# Altium PCB I2CKeypad.PcbDoc
Units mm, origin at the board's own origin, x right, y up, seen from the top; angles counter-clockwise.
Board outline 32 x 50 mm, 2 copper layers (Top Layer, Bottom Layer); 48 components, 37 nets, 124 pads, 29 vias.
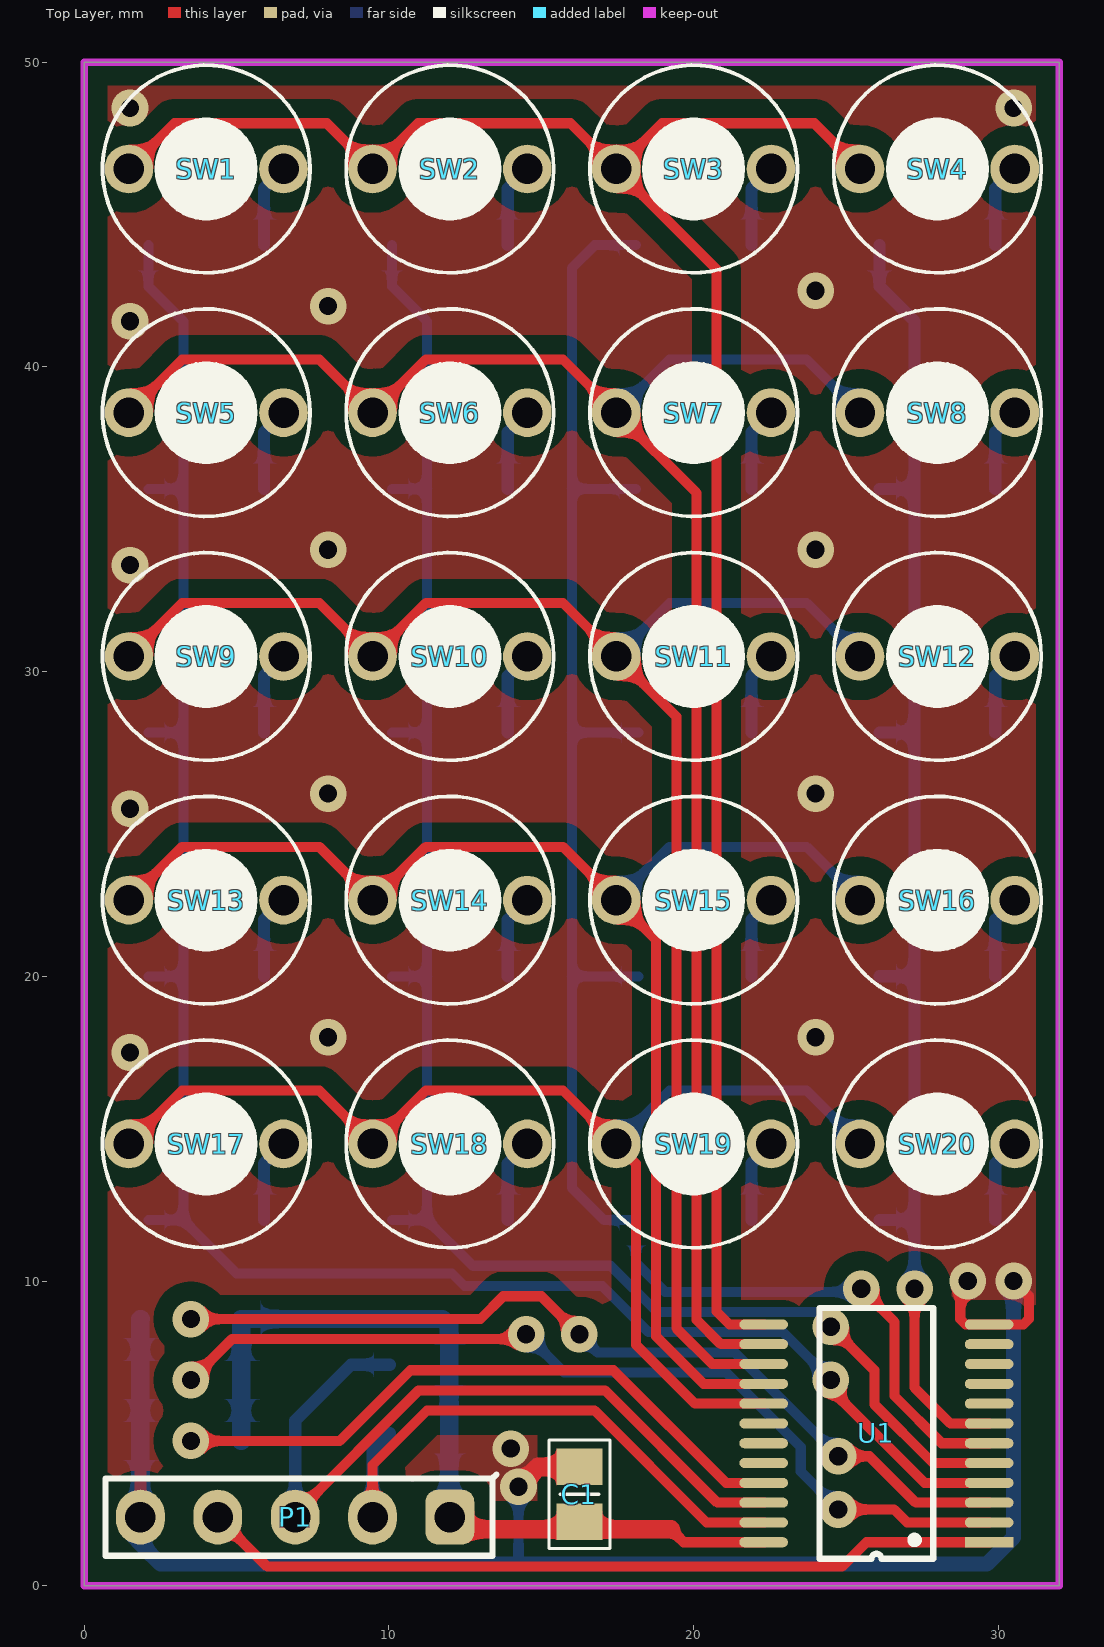
[diagram p0: Top Layer view]
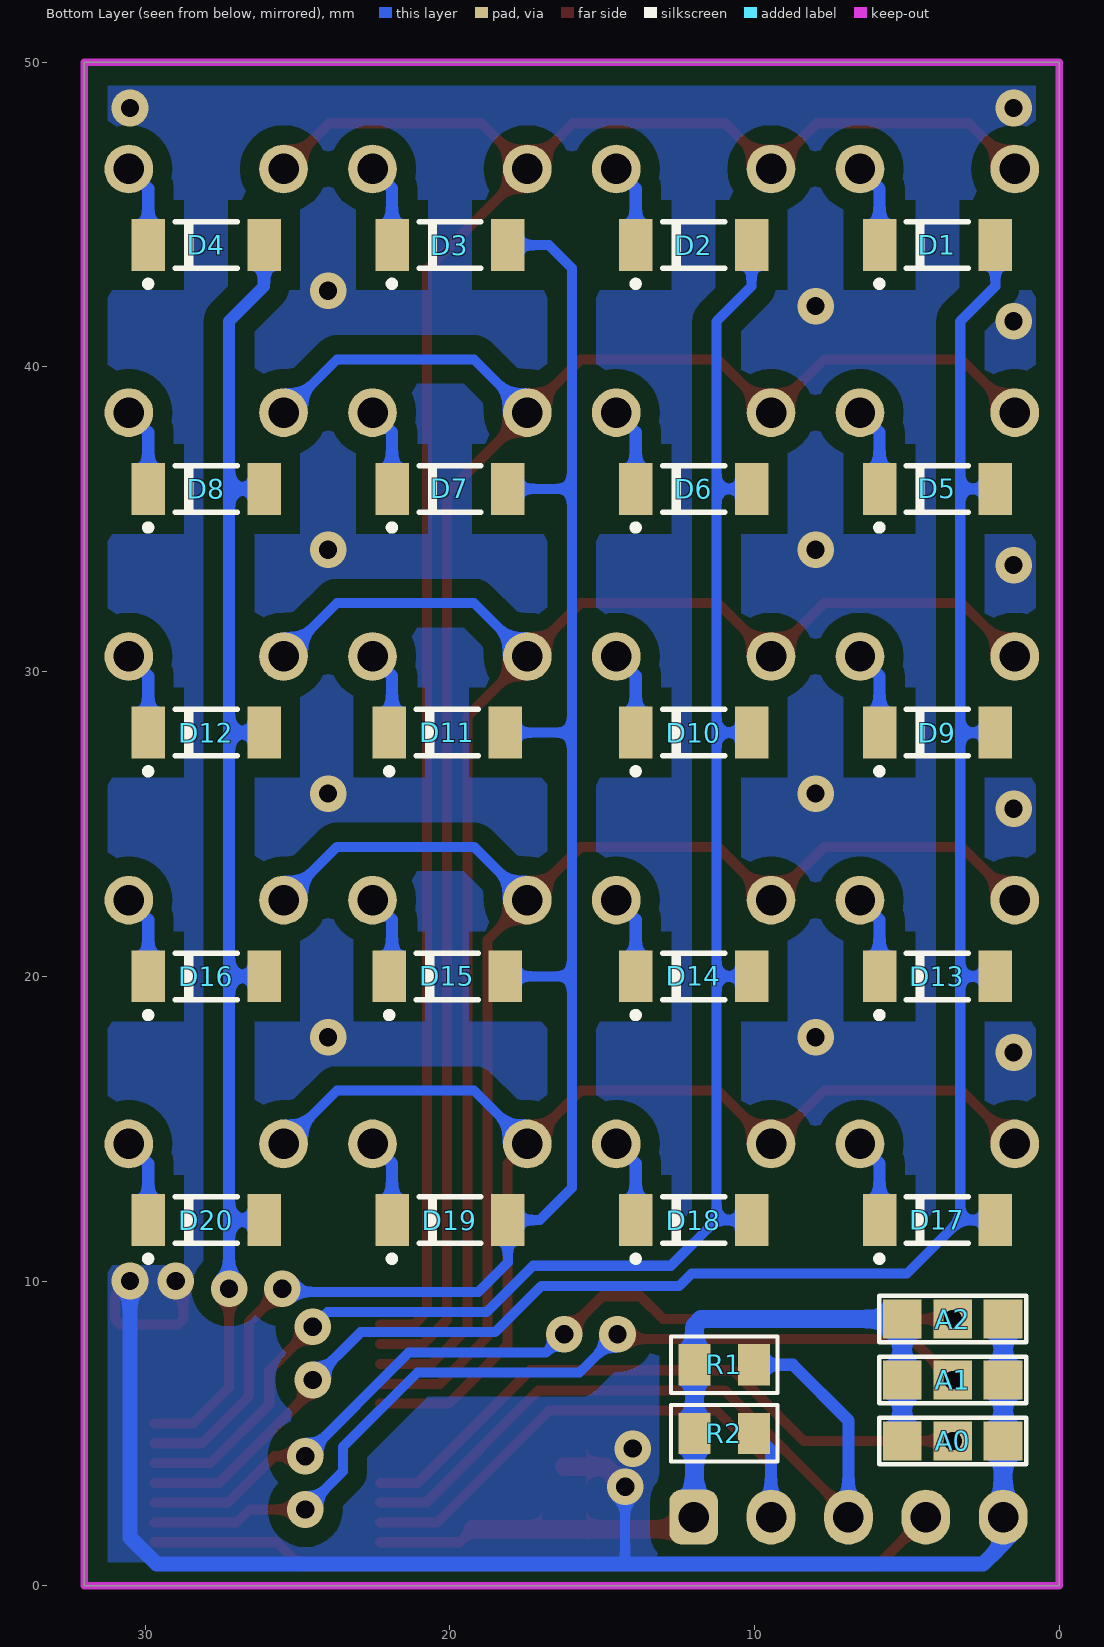
[diagram p1: Bottom Layer view, seen from below]
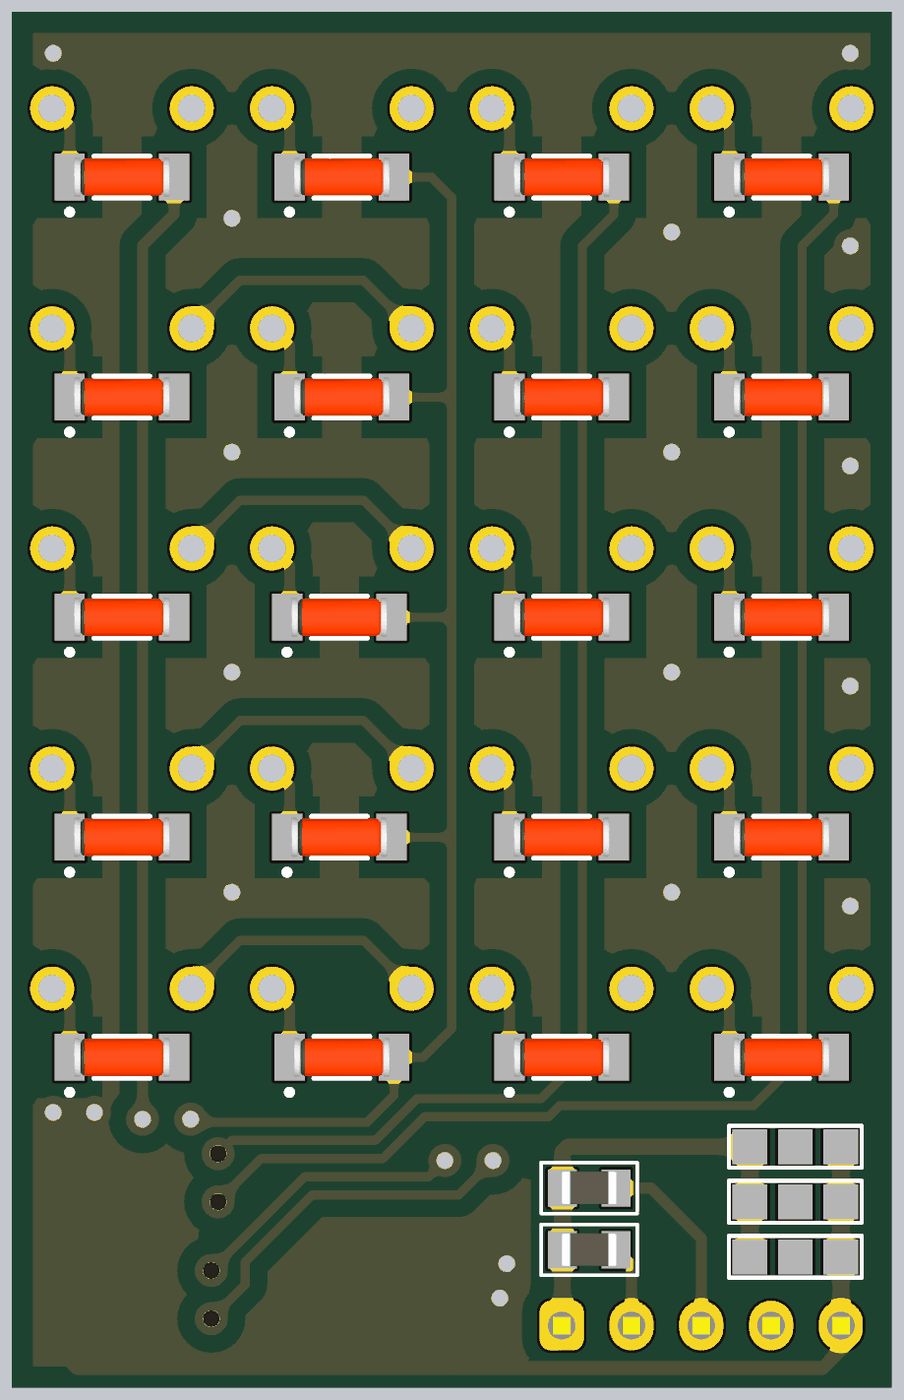
[diagram p2: 3D render of the assembled board from below, using the file's embedded part models]

## Layer stack, top to bottom
Top Solder: solder mask 0.0102, Solder Resist, Dk 3.5
Top Layer: signal copper 0.0356
Dielectric 1: dielectric 0.32, FR-4, Dk 4.8
Bottom Layer: signal copper 0.0356
Bottom Solder: solder mask 0.0102, Solder Resist, Dk 3.5

## Board outline
0,0 0,50 32,50 32,0

## Design rules (kind name [scope] priority, off if disabled: settings)
Clearance Clearance_1 [InPolygon] p1: gap=0.635
Clearance [All] p2: gap=0.33
PolygonConnect PolygonConnect_1 [IsVia] p1: connectstyle=Direct reliefconductorwidth=0.254 reliefentries=4 polygonreliefangle="90 Angle" airgapwidth=0.254
PolygonConnect [All] p2: connectstyle=Relief reliefconductorwidth=0.381 reliefentries=4 polygonreliefangle="90 Angle" airgapwidth=0.635
RoutingVias [All] p1: holewidth=1.524 width=2.54 viastyle="Through Hole" minholewidth=0.508 minwidth=1.016 maxholewidth=0.711 maxwidth=1.27
SolderMaskExpansion [All] p1: expansion=0.102
UnpouredPolygon [All] p1: allowunpoured=FALSE
Width [All] p1: maxlimit=5.08 minlimit=0.203 preferedwidth=0.305
29 further rules are at their usual default settings.

## Components (designator, comment, footprint, x,y, rotation, side; value= is the part's Value field where it differs from the comment)
A0 "JUMP 3" "JUMP3 SMD" 3.5,4.75 r180 bottom
A1 "JUMP 3" "JUMP3 SMD" 3.5,6.75 r180 bottom
A2 "JUMP 3" "JUMP3 SMD" 3.5,8.75 r180 bottom
C1 "100nF" "C 0805" 16.25,3 r90 top
D1 "1N4148" "Diode SOD80C Wave" 4,44 r0 bottom
D2 "1N4148" "Diode SOD80C Wave" 12,44 r0 bottom
D3 "1N4148" "Diode SOD80C Wave" 20,44 r0 bottom
D4 "1N4148" "Diode SOD80C Wave" 28,44 r0 bottom
D5 "1N4148" "Diode SOD80C Wave" 4,36 r0 bottom
D6 "1N4148" "Diode SOD80C Wave" 12,36 r0 bottom
D7 "1N4148" "Diode SOD80C Wave" 20,36 r0 bottom
D8 "1N4148" "Diode SOD80C Wave" 28,36 r0 bottom
D9 "1N4148" "Diode SOD80C Wave" 4,28 r0 bottom
D10 "1N4148" "Diode SOD80C Wave" 12,28 r0 bottom
D11 "1N4148" "Diode SOD80C Wave" 20.09,28 r0 bottom
D12 "1N4148" "Diode SOD80C Wave" 28,28 r0 bottom
D13 "1N4148" "Diode SOD80C Wave" 4,20 r0 bottom
D14 "1N4148" "Diode SOD80C Wave" 12,20 r0 bottom
D15 "1N4148" "Diode SOD80C Wave" 20.09,20 r0 bottom
D16 "1N4148" "Diode SOD80C Wave" 28,20 r0 bottom
D17 "1N4148" "Diode SOD80C Wave" 4,12 r0 bottom
D18 "1N4148" "Diode SOD80C Wave" 12,12 r0 bottom
D19 "1N4148" "Diode SOD80C Wave" 20,12 r0 bottom
D20 "1N4148" "Diode SOD80C Wave" 28,12 r0 bottom
P1 "Header 5" "Header 5" 12,2.25 r180 top
R1 "4.7K" "R 0805" 11,7.25 r0 bottom
R2 "4.7K" "R 0805" 11,5 r0 bottom
SW1 "Button" SW/2/DIP 4,46.5 r0 top
SW2 "Button" SW/2/DIP 12,46.5 r0 top
SW3 "Button" SW/2/DIP 20,46.5 r0 top
SW4 "Button" SW/2/DIP 28,46.5 r0 top
SW5 "Button" SW/2/DIP 4,38.5 r0 top
SW6 "Button" SW/2/DIP 12,38.5 r0 top
SW7 "Button" SW/2/DIP 20,38.5 r0 top
SW8 "Button" SW/2/DIP 28,38.5 r0 top
SW9 "Button" SW/2/DIP 4,30.5 r0 top
SW10 "Button" SW/2/DIP 12,30.5 r0 top
SW11 "Button" SW/2/DIP 20,30.5 r0 top
SW12 "Button" SW/2/DIP 28,30.5 r0 top
SW13 "Button" SW/2/DIP 4,22.5 r0 top
SW14 "Button" SW/2/DIP 12,22.5 r0 top
SW15 "Button" SW/2/DIP 20,22.5 r0 top
SW16 "Button" SW/2/DIP 28,22.5 r0 top
SW17 "Button" SW/2/DIP 4,14.5 r0 top
SW18 "Button" SW/2/DIP 12,14.5 r0 top
SW19 "Button" SW/2/DIP 20,14.5 r0 top
SW20 "Button" SW/2/DIP 28,14.5 r0 top
U1 "PCF8575TS" SSOP24/PCF8575TS 26,5 r180 top

## Footprints (in the part's own frame and the unit in brackets; to place one, negate y for a bottom-side part, rotate by r counter-clockwise, add the part's x,y. Pads: shape width x height; smd on the part's side, far side on the other; paste and mask are expansions set on the pad)
"C 0805" [mm] "Chip Capacitor, 2-Leads, Body 2.0x1.3mm, IPC Medium Density"
  rect 1.2x1.5 smd: 1(-0.9,0) 2(0.9,0)
  silkscreen extent -1.78,-1 1.78,1, body extent -1,-0.64 1,0.61, height 0.6
"Diode SOD80C Wave" [mm]
  rect 1.1x1.7 smd: 1(-1.9,0) 2(1.9,0)
  silkscreen extent -1.02,-0.76 2.01,1.37, body extent -1.75,-0.72 1.75,0.73, height 1.44
"Header 5" [mm]
  rrect50% 1.6x1.8 hole 1: 1(0,0)
  oval 1.6x1.8 hole 1: 2(2.54,0) 3(5.08,0) 4(7.62,0) 5(10.16,0)
  silkscreen extent -1.52,-1.4 11.3,1.27, body extent -1.27,-1.27 11.43,1.27, height 8.89
"JUMP3 SMD" [mil]
  rect 50x50 smd: 1(-65,0) 2(0,0) 3(65,0)
  silkscreen extent -95,-30 95,30
"R 0805" [mm] "Chip Resistor, 2-Leads, Body 2.0x1.3mm, IPC Medium Density"
  rect 1.05x1.35 smd: 1(-0.975,0) 2(0.975,0)
  silkscreen extent -1.75,-0.92 1.75,0.92, body extent -1,-0.61 1,0.59, height 0.5
SSOP24/PCF8575TS [mm]
  rect 1.6x0.33 smd: 1(-3.7,3.575)
  oval 1.6x0.33 smd: 2(-3.7,2.925) 3(-3.7,2.275) 4(-3.7,1.625) 5(-3.7,0.975) 6(-3.7,0.325) 7(-3.7,-0.325) 8(-3.7,-0.975) 9(-3.7,-1.625) 10(-3.7,-2.275) 11(-3.7,-2.925) 12(-3.7,-3.575) 13(3.7,-3.575) 14(3.7,-2.925) 15(3.7,-2.275) 16(3.7,-1.625) 17(3.7,-0.975) 18(3.7,-0.325) 19(3.7,0.325) 20(3.7,0.975) 21(3.7,1.625) 22(3.7,2.275) 23(3.7,2.925) 24(3.7,3.575)
  silkscreen extent -1.87,-4.12 1.86,4.12, body extent -3.77,-4.12 3.77,4.12, height 1.85
SW/2/DIP [mm]
  round 1.6 hole 1: 1(-2.54,0) 2(2.54,0)
  silkscreen extent -3.4,-3.41 3.41,3.41, body extent -3.4,-3.42 3.43,3.43, height 3.81

## Part data
C1: library part "Capacitor NP", "Capacitor non-pol"
D1 D2 D3 D4 D5 D6 D7 D8 D9 D10 D11 D12 D13 D14 D15 D16 D17 D18 D19 D20: library part Diode, "Default Diode"
P1: "Header, 5-Pin"
R1 R2: library part Resistor, "Resistor"
SW1 SW2 SW3 SW4 SW5 SW6 SW7 SW8 SW9 SW10 SW11 SW12 SW13 SW14 SW15 SW16 SW17 SW18 SW19 SW20: library part "SW SPST", "Tact switch 2 pin"
U1: "PCF8575 Remote16-BIT I  2C AND SMBus I/O Expander  with Interrupt Output"

## Via types
v1: diameter 1.2, hole 0.6, Top Layer to Bottom Layer, tented both sides, 29 vias

## Nets (pads, with @x,y where several pads share a name; then routed paths per layer and width w, separated by ;. In a path a pad name is that pad's centre, name@x,y a point inside that pad or via, vN(x,y) a via of type N, cw(c..) or ccw(c..) an arc to the next point about the centre after c; other vN are vias at no path point)
A0: A0.2 U1.21 | length 21.3
  Top Layer w0.33: v1(3.5,4.75) 8.383,4.75 10.703,7.07 17.363,7.07 21.059,3.375 U1.21
A1: A1.2 U1.2 | length 29.9
  Top Layer w0.33: v1(3.5,6.75) 4.84,8.09 14.34,8.09 v1(14.5,8.25) ; v1(24.75,2.5) 26.582,2.5 27.007,2.075 U1.2
  Bottom Layer w0.33: v1(14.5,8.25) 15.75,7 21.066,7 23.515,4.551 23.515,3.75 24.75,2.515 v1(24.75,2.5)
A2: A2.2 U1.3 | length 29.3
  Top Layer w0.33: v1(3.5,8.75) 13,8.75 13.75,9.5 15,9.5 v1(16.25,8.25) ; v1(24.75,4.25) 25.765,4.25 27.29,2.725 U1.3
  Bottom Layer w0.33: v1(16.25,8.25) 16.84,7.66 21.34,7.66 v1(24.75,4.25)
COL1: D1.1 D5.1 D9.1 D13.1 D17.1 U1.4 | length 67.3
  Top Layer w0.33: v1(24.5,6.75) 24.5,6.449 27.574,3.375 U1.4
  Bottom Layer w0.33: D17.1 3.25,12 ; D13.1 3.25,20 ; D9.1 3.25,28 ; D5.1 3.25,36 ; D1.1 2.1,42.65 3.25,41.5 3.25,36 ; v1(24.5,6.75) 22.93,8.32 18.519,8.32 17,9.84 12.477,9.84 12.066,10.25 5,10.25 3.25,12 ; 3.25,12 3.25,20 ; 3.25,20 3.25,28 ; 3.25,28 3.25,36
COL2: D2.1 D6.1 D10.1 D14.1 D18.1 U1.5 | length 59.5
  Top Layer w0.33: v1(24.5,8.5) 25.93,7.07 25.93,5.953 27.858,4.025 U1.5
  Bottom Layer w0.33: D18.1 11.25,12 ; D14.1 11.25,20 ; D10.1 11.25,28 ; D6.1 11.25,36 ; D2.1 10.1,42.65 11.25,41.5 11.25,36 ; v1(24.5,8.5) 24.019,8.981 18.793,8.981 17.273,10.5 12.75,10.5 11.25,12 ; 11.25,12 11.25,20 ; 11.25,20 11.25,28 ; 11.25,28 11.25,36
COL3: D3.1 D7.1 D11.1 D15.1 D19.1 U1.6 | length 58.6
  Top Layer w0.33: v1(25.5,9.75) 26.59,8.66 26.59,6.227 28.141,4.675 U1.6
  Bottom Layer w0.33: D7.1 16,36 ; D3.1 16.75,44 16,43.25 16,36 ; D15.1 16,20 ; D11.1 16,28 ; v1(25.5,9.75) 25.391,9.641 19.066,9.641 18.1,10.607 D19.1 17.05,12 16,13.05 16,20 ; 16,20 16,28 ; 16,28 16,36
COL4: D4.1 D8.1 D12.1 D16.1 D20.1 U1.7 | length 45.5
  Top Layer w0.33: v1(27.25,9.75) 27.25,6.5 28.425,5.325 U1.7
  Bottom Layer w0.4: D20.1 27.25,12 ; D16.1 27.25,20 ; D12.1 27.25,28 ; D8.1 27.25,36 ; D4.1 26.1,42.65 27.25,41.5 27.25,36 ; v1(27.25,9.75) 27.25,12 ; 27.25,12 27.25,20 ; 27.25,20 27.25,28 ; 27.25,28 27.25,36
GND: A0.3 A1.3 A2.3 C1.2 P1.5 U1.12 | length 55.1
  Top Layer w0.33: v1(29,10) 28.75,9.75 28.75,8.75 28.925,8.575 U1.12 30.825,8.575 31,8.75 31,9.5 v1(30.5,10)
  Top Layer w0.6: v1(14.25,3.25) 14.9,3.9 C1.2
  Bottom Layer w0.33: 14.25,0.707 v1(14.25,3.25)
  Bottom Layer w0.5: P1.5 1.84,1.367 2.5,0.707 14.25,0.707 29.622,0.707 30.5,1.585 v1(30.5,10)
  Bottom Layer w0.6: P1.5 1.84,8.741 A2.3
  other v1: 14,4.5 1.5,17.5 8,18 24,18 1.5,25.5 8,26 24,26 1.5,33.5 8,34 24,34 1.5,41.5 8,42 24,42.5 1.5,48.5 30.5,48.5
INT: P1.4 U1.1 | length 26.3
  Top Layer w0.33: P1.4 6.008,0.622 24.872,0.622 25.675,1.425 U1.1
NetD1_2: D1.2 SW1.2 | length 2.8
  Bottom Layer w0.4: D1.2 5.9,45.86 SW1.2
NetD2_2: D2.2 SW2.2 | length 2.8
  Bottom Layer w0.4: D2.2 13.9,45.86 SW2.2
NetD3_2: D3.2 SW3.2 | length 2.8
  Bottom Layer w0.4: D3.2 21.9,45.86 SW3.2
NetD4_2: D4.2 SW4.2 | length 2.8
  Bottom Layer w0.4: D4.2 29.9,45.86 SW4.2
NetD5_2: D5.2 SW5.2 | length 2.8
  Bottom Layer w0.4: D5.2 5.9,37.86 SW5.2
NetD6_2: D6.2 SW6.2 | length 2.8
  Bottom Layer w0.4: D6.2 13.9,37.86 SW6.2
NetD7_2: D7.2 SW7.2 | length 2.8
  Bottom Layer w0.4: D7.2 21.9,37.86 SW7.2
NetD8_2: D8.2 SW8.2 | length 2.8
  Bottom Layer w0.4: D8.2 29.9,37.86 SW8.2
NetD9_2: D9.2 SW9.2 | length 2.8
  Bottom Layer w0.4: D9.2 5.9,29.86 SW9.2
NetD10_2: D10.2 SW10.2 | length 2.8
  Bottom Layer w0.4: D10.2 13.9,29.86 SW10.2
NetD11_2: D11.2 SW11.2 | length 2.8
  Bottom Layer w0.4: D11.2@21.9,28 21.9,29.86 SW11.2
NetD12_2: D12.2 SW12.2 | length 2.8
  Bottom Layer w0.4: D12.2 29.9,29.86 SW12.2
NetD13_2: D13.2 SW13.2 | length 2.8
  Bottom Layer w0.4: D13.2 5.9,21.86 SW13.2
NetD14_2: D14.2 SW14.2 | length 2.8
  Bottom Layer w0.4: D14.2 13.9,21.86 SW14.2
NetD15_2: D15.2 SW15.2 | length 2.8
  Bottom Layer w0.4: D15.2@21.9,20 21.9,21.86 SW15.2
NetD16_2: D16.2 SW16.2 | length 2.8
  Bottom Layer w0.4: D16.2 29.9,21.86 SW16.2
NetD17_2: D17.2 SW17.2 | length 2.8
  Bottom Layer w0.4: D17.2 5.9,13.86 SW17.2
NetD18_2: D18.2 SW18.2 | length 2.8
  Bottom Layer w0.4: D18.2 13.9,13.86 SW18.2
NetD19_2: D19.2 SW19.2 | length 2.8
  Bottom Layer w0.4: D19.2 21.9,13.86 SW19.2
NetD20_2: D20.2 SW20.2 | length 2.8
  Bottom Layer w0.4: D20.2 29.9,13.86 SW20.2
ROW1: SW1.1 SW2.1 SW3.1 SW4.1 U1.13 | length 68.3
  Top Layer w0.33: SW1.1 2.96,48 7.96,48 SW2.1 10.96,48 15.96,48 SW3.1 ; U1.13 21.175,8.575 20.75,9 20.75,43.21 SW3.1 ; SW4.1 23.96,48 18.96,48 SW3.1
ROW2: SW5.1 SW6.1 SW7.1 SW8.1 U1.14 | length 61.8
  Top Layer w0.33: SW5.1 3.21,40.25 7.71,40.25 SW6.1 11.21,40.25 15.71,40.25 SW7.1 20.09,35.87 20.09,8.727 20.891,7.925 U1.14
  Bottom Layer w0.33: SW7.1 19.21,40.25 23.71,40.25 SW8.1
ROW3: SW9.1 SW10.1 SW11.1 SW12.1 U1.15 | length 54.6
  Top Layer w0.33: SW9.1 3.21,32.25 7.71,32.25 SW10.1 11.21,32.25 15.71,32.25 SW11.1 19.43,28.53 19.43,8.453 20.608,7.275 U1.15
  Bottom Layer w0.33: SW11.1 19.21,32.25 23.71,32.25 SW12.1
ROW4: SW13.1 SW14.1 SW15.1 SW16.1 U1.16 | length 47.4
  Top Layer w0.33: SW13.1 3.21,24.25 7.71,24.25 SW14.1 11.21,24.25 15.71,24.25 SW15.1 18.769,21.191 18.769,8.18 20.324,6.625 U1.16
  Bottom Layer w0.33: SW15.1 19.21,24.25 23.71,24.25 SW16.1
ROW5: SW17.1 SW18.1 SW19.1 SW20.1 U1.17 | length 40.2
  Top Layer w0.33: SW17.1 3.21,16.25 7.71,16.25 SW18.1 11.21,16.25 15.71,16.25 SW19.1 18.109,13.851 18.109,7.906 20.04,5.975 U1.17
  Bottom Layer w0.33: SW19.1 19.21,16.25 23.71,16.25 SW20.1
SCL: P1.3 R1.1 U1.22 | length 26.2
  Top Layer w0.33: P1.3@6.92,2 6.92,2.354 10.977,6.41 17.09,6.41 20.775,2.725 U1.22
  Bottom Layer w0.4: P1.3@6.92,2 6.92,5.42 8.75,7.25 R1.1
SDA: P1.2 R2.1 U1.23 | length 20.3
  Top Layer w0.33: P1.2@9.46,2 9.46,3.96 11.25,5.75 16.75,5.75 20.425,2.075 U1.23
  Bottom Layer w0.4: P1.2@9.46,2 9.46,4.435 R2.1
VCC: A0.1 A1.1 A2.1 C1.1 P1.1 R1.2 R2.2 U1.24 | length 28
  Top Layer w0.33: 19.25,1.85 19.675,1.425 U1.24
  Top Layer w0.6: P1.1@12,2 12.15,1.85 19.25,1.85
  Bottom Layer w0.6: A0.1 A1.1 A2.1 11.75,8.75 11.975,8.525 R1.2 R2.2 11.975,2.025 P1.1@12,2
pads on no net: U1.8 U1.9 U1.10 U1.11 U1.18 U1.19 U1.20

## Polygon pours and split planes (outlines as drawn)
GND on Top Layer "TOP" (solid, remove dead copper, pour order 2): 0,0 32,0 32,50 0,50
GND on Bottom Layer "BOT" (solid, remove dead copper, pour order 4): 0,50 32,50 32,0 0,0

## Keep-outs
Keep-Out Layer:
  the board outline again, w0.254

## Silkscreen, mask and mechanical layers (free items; w line width, h text height)
Mechanical 31:
  text "GND" at 2.25,4 h1.5 r90
  text "INT" at 4.75,4 h1.5 r90
  text "SCL" at 7.5,4 h1.5 r90
  text "SDA" at 10,4 h1.5 r90
  text "VCC" at 12.5,4 h1.5 r90

## Dimensions
0,0 to 0,50 on Mechanical 16
0,0 to 32,0 on Mechanical 16